# Altium PCB ALIMENTACION BORRADOR.PcbDoc
Units mil, origin at the board's own origin, x right, y up, seen from the top; angles counter-clockwise.
Board outline 6000 x 4000 mil, 2 copper layers (Top Layer, Bottom Layer); 31 components, 18 nets, 67 pads, 0 vias.
Unrouted connection lines stored in the file: 36.
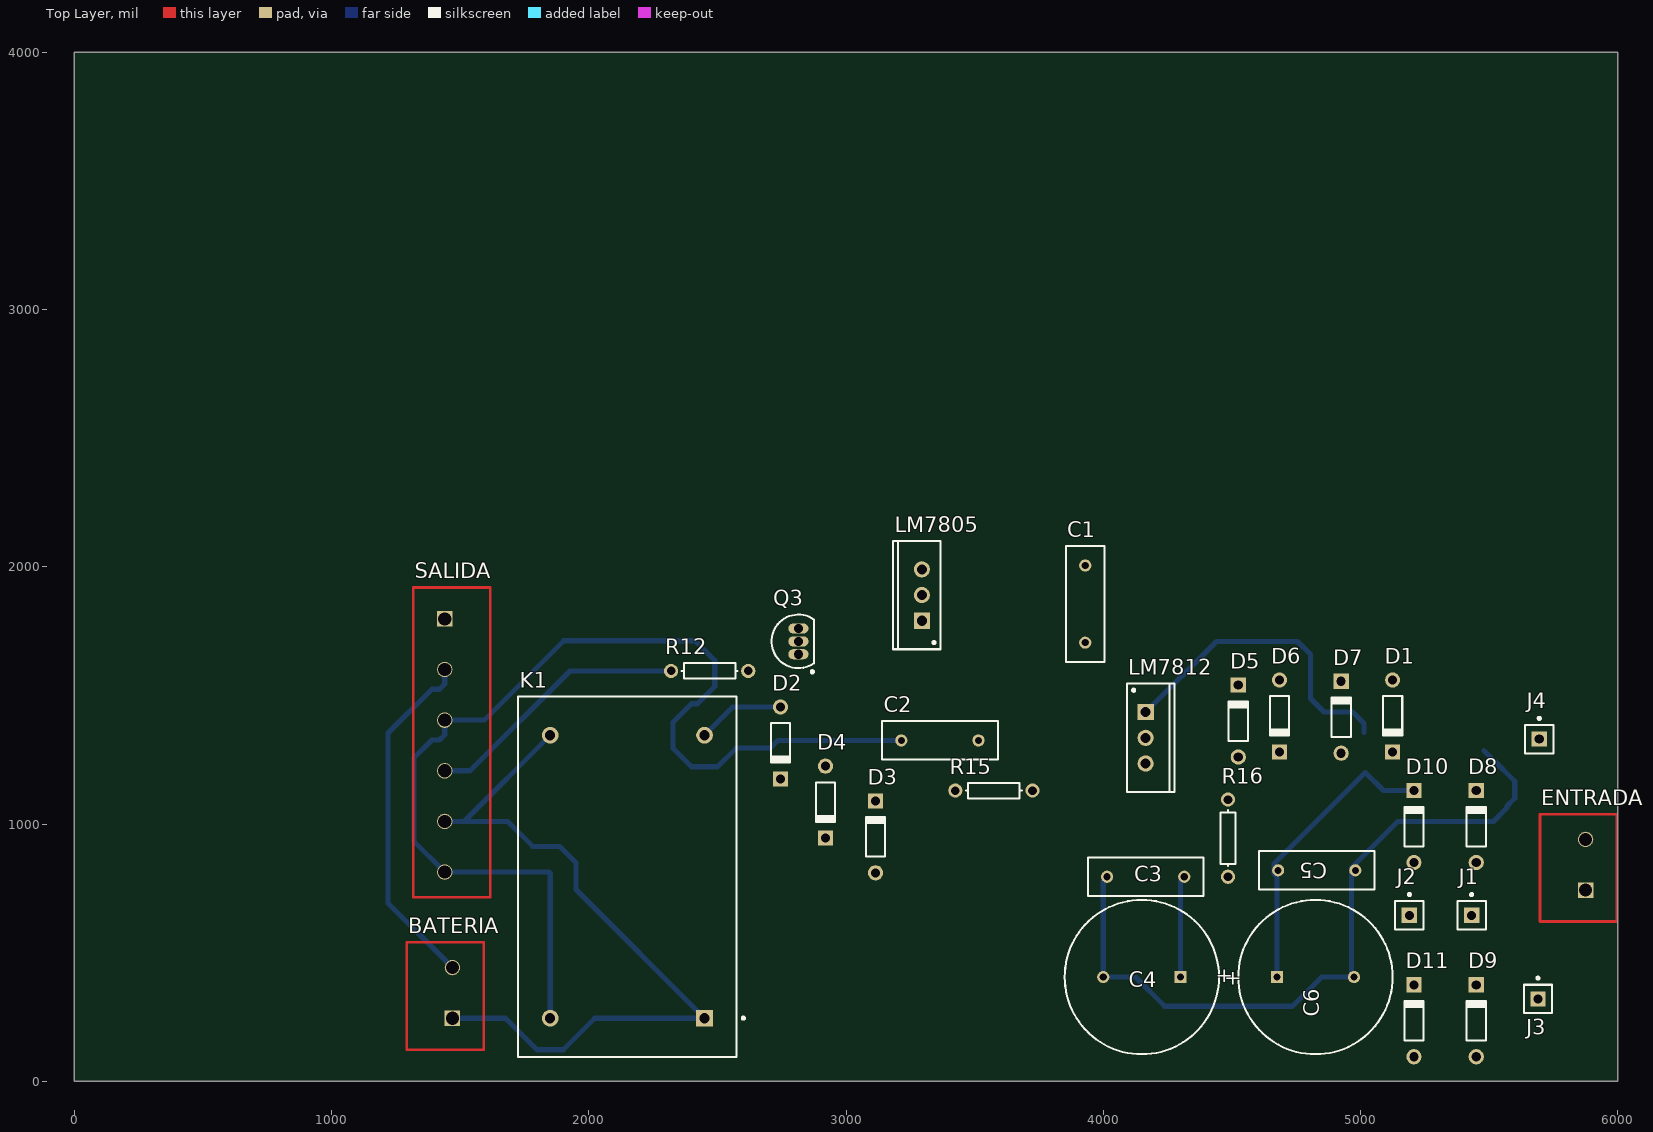
[diagram p0: Top Layer view]
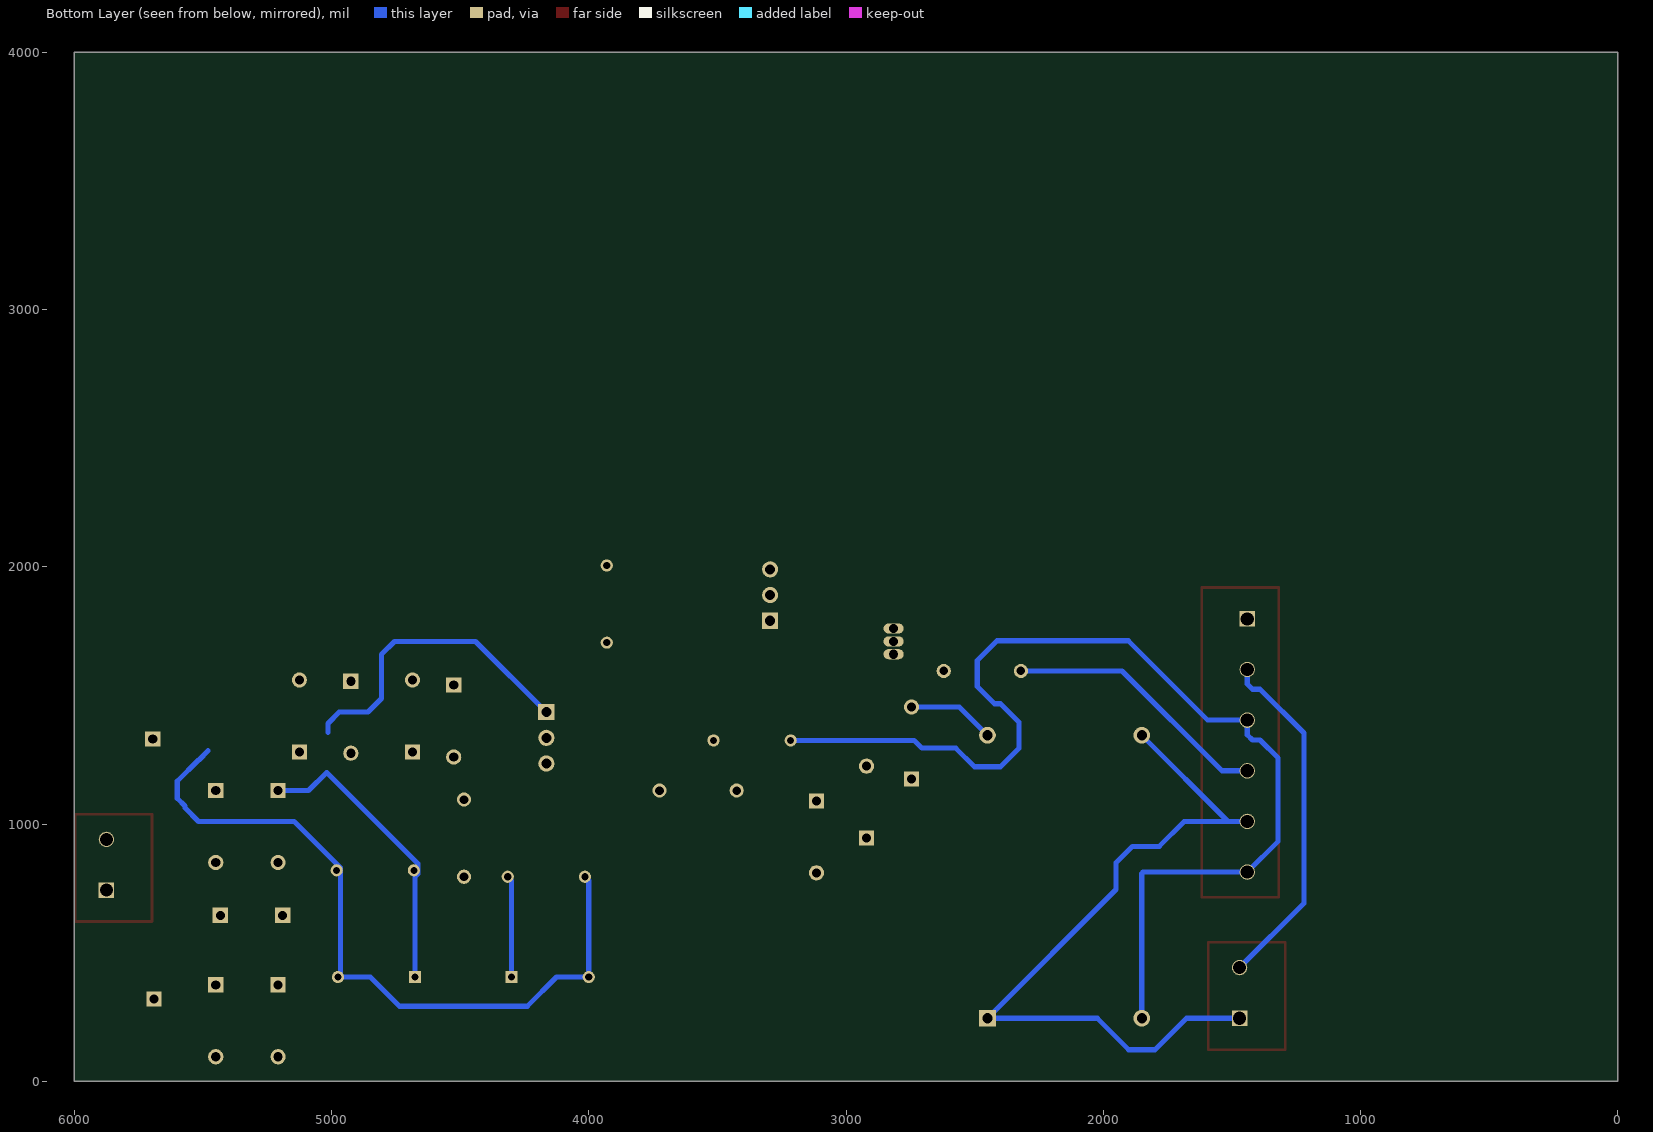
[diagram p1: Bottom Layer view, seen from below]

## Layer stack, top to bottom
Top Solder: solder mask 0.4, Solder Resist, Dk 3.5
Top Layer: signal copper 1.4
Dielectric 1: dielectric 12.6, FR-4, Dk 4.8
Bottom Layer: signal copper 1.4
Bottom Solder: solder mask 0.4, Solder Resist, Dk 3.5

## Board outline
0,0 6000,0 6000,4000 0,4000

## Design rules (kind name [scope] priority, off if disabled: settings)
Clearance [All] p1: gap=80 ignorepadtopadclearanceinfootprint=FALSE
PolygonConnect [All] p1: connectstyle=Relief reliefconductorwidth=10 reliefentries=4 polygonreliefangle="90 Angle" airgapwidth=10
RoutingVias [All] p1: holewidth=28 width=50 viastyle="Through Hole" minholewidth=28 minwidth=50 maxholewidth=28 maxwidth=50
SolderMaskExpansion [All] p1: expansion=4
Width [All] p1: maxlimit=80 minlimit=20 preferedwidth=40
30 further rules are at their usual default settings.

## Components (designator, comment, footprint, x,y, rotation, side; value= is the part's Value field where it differs from the comment)
BATERIA "Header 2" "Bornera 2 pin" 1292.83,122.95 r90 top
C1 "Cap" RAD-0.3 3930,1855 r90 top value=100pF
C2 "Cap" RAD-0.3 3365,1325 r180 top value=100pF
C3 "Cap" RAD-0.3 4165,795 r0 top value=100pF
C4 "Cap Pol1" RB7.6-15 4150,405 r0 top value=100pF
C5 "Cap" RAD-0.3 4830,820 r180 top value=100pF
C6 "Cap Pol1" RB7.6-15 4825,405 r180 top value=100pF
D1 "Diode 1N914" DO-35 5125,1420 r270 top
D2 "Diode 1N914" DO-35 2745,1315 r270 top
D3 "D Schottky" DO-35 3115,950 r90 top
D4 "Diode 1N914" DO-35 2920,1085 r270 top
D5 "Diode 1N914" DO-35 4525,1400 r90 top
D6 "Diode 1N914" DO-35 4685,1420 r270 top
D7 "Diode 1N914" DO-35 4925,1415 r90 top
D8 "Diode 1N914" DO-35 5450,990 r90 top
D9 "Diode 1N914" DO-35 5450,235 r90 top
D10 "Diode 1N914" DO-35 5207.72,990 r90 top
D11 "Diode 1N914" DO-35 5207.72,235 r90 top
"ENTRADA 220" "220V" "Bornera 2 pin" 5697.83,621.1 r90 top
J1 "Socket" PIN1 5432.28,645 r0 top
J2 "Socket" PIN1 5190,645 r0 top
J3 "Socket" PIN1 5690,320 r0 top
J4 "Socket" PIN1 5695,1330 r0 top
K1 "Relay-SPST" MODULE4 2150,795 r90 top
LM7805 "Volt Reg" TO-220AB 3295,1890 r90 top
LM7812 "Volt Reg" TO-220AB 4165,1335 r270 top
Q3 "NPN" TO-226-AA 2815,1710 r0 top
R12 "Res1" AXIAL-0.3 2470,1595 r0 top value=1K
R15 "Res1" AXIAL-0.3 3575,1130 r0 top value=1K
R16 "Res1" AXIAL-0.3 4485,945 r270 top value=1K
SALIDA "Header 6" "BORNERA 6 PIN" 1617.17,1919.45 r270 top

## Footprints (in the part's own frame and the unit in brackets; to place one, negate y for a bottom-side part, rotate by r counter-clockwise, add the part's x,y. Pads: shape width x height; smd on the part's side, far side on the other; paste and mask are expansions set on the pad)
AXIAL-0.3 [mm] "Axial Device, Thru-Hole; 2 Leads; 0.3 in Pin Spacing"
  round 1.4 hole 0.85: 1(-3.81,0) 2(3.81,0)
  silkscreen extent -2.77,-0.76 2.77,0.76
"Bornera 2 pin" [mm]
  rect 1.524x1.524 hole 1.3: 1(3.1,-4.5)
  round 1.524 hole 1.3: 2(8.1,-4.5)
  Top Layer lines w0.254: 0,0 10.6,0 10.6,-7.6 0,-7.6 0,0
"BORNERA 6 PIN" [mm]
  rect 1.524x1.524 hole 1.3: 1(3.1,-4.5)
  round 1.524 hole 1.3: 2(8.1,-4.5) 3(13.1,-4.5) 4(18.1,-4.5) 5(23.1,-4.5) 6(28.1,-4.5)
  Top Layer lines w0.254: 30.6,-7.6 30.6,0 0,0 0,-7.6 30.6,-7.6
DO-35 [mm] "Diode, Axial; Body 3.8 x 1.9 mm (LxDia. max), Lead Dia. 0.53 mm (max)"
  round 1.5 hole 0.9: 1(-3.55,0)
  rect 1.5x1.5 hole 0.9: 2(3.55,0)
  silkscreen extent -1.95,-0.95 2.05,0.95
MODULE4 [mm] "DIP; 4 Round Pins; Row Space 27.94 mm; Pitch 15.24 mm"
  rect 1.65x1.65 hole 1: 1(-13.97,-7.62)
  round 1.65 hole 1: 2(-13.97,7.62) 3(13.97,-7.62) 4(13.97,7.62)
  silkscreen extent -17.8,-11.58 17.8,10.8, body extent -17.8,-10.8 17.8,10.8, height 14
PIN1 [mm] "Connector; Plug"
  rect 1.5x1.5 hole 0.9: 1(0,0)
  silkscreen extent -1.4,-1.4 1.4,2.17
RAD-0.3 [mm] "Radial Cap, Thru-Hole; 2 Leads; 0.3 in Pin Spacing"
  round 1.2 hole 0.7: 1(-3.81,0) 2(3.81,0)
  silkscreen extent -5.71,-1.91 5.71,1.91
RB7.6-15 [mm] "Polarized Capacitor (Radial); 2 Leads"
  rect 1.2x1.2 hole 0.7: 1(3.81,0)
  round 1.2 hole 0.7: 2(-3.81,0)
  silkscreen extent -7.62,-7.62 7.62,7.62
TO-220AB [mm] "TO, Thru-Hole, Vertical, Heatsink Mounted; 3 In-Line Leads; Pitch 2.54 mm"
  rect 1.6x1.6 hole 1: 1(-2.54,0)
  round 1.6 hole 1: 2(0,0) 3(2.54,0)
  silkscreen extent -5.35,-1.85 5.35,2.85, body extent -5.4,-1.9 5.4,2.9, height 19.3
TO-226-AA [mm] "TO, Flat Index; 3 In-Line, Axial Leads; Body Dia. 4.8mm; Leads 0.55 x 0.51 mm (max)"
  oval 2x1 hole 0.9: 1(0,-1.27) 2(0,0) 3(0,1.27)
  silkscreen extent -2.65,-3.13 1.52,2.65, body extent -2.65,-2.66 1.52,2.66, height 5.33

## Part data
BATERIA: "Header, 2-Pin", LatestRevisionDate=17-Jul-2002, LatestRevisionNote="Re-released for DXP Platform.", Publisher="Altium Limited"
C1 C2 C3 C5: "Capacitor", LatestRevisionDate=17-Jul-2002, LatestRevisionNote="Re-released for DXP Platform.", PackageDescription="Radial Cap, Thru-Hole; 2 Leads; 0.3 in Pin Spacing", PackageReference=RAD-0.3, Published=8-Jun-2000, Publisher="Altium Limited"
C4 C6: "Polarized Capacitor (Radial)", LatestRevisionDate=17-Jul-2002, LatestRevisionNote="Re-released for DXP Platform.", PackageDescription="Polarized Capacitor (Radial); 2 Leads", PackageReference=RB7.6-15, Published=8-Jun-2000, Publisher="Altium Limited"
D1 D2 D4 D5 D6 D7 D8 D9 D10 D11: "High Conductance Fast Diode", Code_JEDEC=DO-204-AH, ComponentLink1Description="Manufacturer Link", ComponentLink1URL=http://www.fairchildsemi.com/, ComponentLink2Description=Datasheet, ComponentLink2URL=http://www.fairchildsemi.com/ds/1N%2F1N4448.pdf, DatasheetVersion=1997, LatestRevisionDate=17-Jul-2002, LatestRevisionNote="Re-released for DXP Platform.", PackageDescription="Diode, Axial; Body 3.8 x 1.9 mm (LxDia. max), Lead Dia. 0.53 mm (max)", PackageReference=DO-35, Published=8-Jun-2000, Publisher="Altium Limited"
D3: "Schottky Diode", Code_JEDEC=DO-214-AA, LatestRevisionDate=17-Jul-2002, LatestRevisionNote="Re-released for DXP Platform.", PackageDescription="DO-214-AA/SMB; 2 C-Bend Leads; Body 5.3 x 3.6 mm, inc. leads (LxW)", PackageReference=SMB, Published=8-Jun-2000, Publisher="Altium Limited"
"ENTRADA 220": library part "Header 2", "Header, 2-Pin", LatestRevisionDate=17-Jul-2002, LatestRevisionNote="Re-released for DXP Platform.", Publisher="Altium Limited"
K1: "Single-Pole Single-Throw Relay", LatestRevisionDate=17-Jul-2002, LatestRevisionNote="Re-released for DXP Platform.", PackageReference=MODULE4, Published=24-Mar-1999, Publisher="Altium Limited"
LM7805 LM7812: "Voltage Regulator", LatestRevisionDate=29-May-2009, LatestRevisionNote="IPC-7351 Footprint Added.", PackageDescription="3-Pin Transistor Outline Package 2.54 mm Pitch, 15.1 mm Lead Span", PackageReference=D2PAK, Published=24-Mar-1999, Publisher="Altium Limited"
Q3: "NPN Bipolar Transistor", Code_JEDEC=TO-226-AA, LatestRevisionDate=17-Jul-2002, LatestRevisionNote="Re-released for DXP Platform.", PackageDescription="TO, Flat Index; 3 In-Line, Axial Leads; Body Dia. 4.8mm; Leads 0.55 x 0.51 mm (max)", PackageReference=TO-226-AA, Published=8-Jun-2000, Publisher="Altium Limited"
R12 R15 R16: "Resistor", LatestRevisionDate=17-Jul-2002, LatestRevisionNote="Re-released for DXP Platform.", PackageDescription="Axial Device, Thru-Hole; 2 Leads; 0.3 in Pin Spacing", PackageReference=AXIAL-0.3, Published=8-Jun-2000, Publisher="Altium Limited"
SALIDA: "Header, 6-Pin", LatestRevisionDate=17-Jul-2002, LatestRevisionNote="Re-released for DXP Platform.", Publisher="Altium Limited"
J1 J2 J3 J4: LatestRevisionDate=17-Jul-2002, LatestRevisionNote="Re-released for DXP Platform.", Publisher="Altium Limited"

## Nets (pads, with @x,y where several pads share a name; then routed paths per layer and width w, separated by ;. In a path a pad name is that pad's centre, name@x,y a point inside that pad or via, vN(x,y) a via of type N, cw(c..) or ccw(c..) an arc to the next point about the centre after c; other vN are vias at no path point)
"13,8 V": BATERIA.1 D2.2 D4.2 K1.1 K1.4 SALIDA.5 | length 2943.4
  Bottom Layer w20: SALIDA.5 1515,1010 ; BATERIA.1 1676.79,245 1799.27,122.52 1900.73,122.52 2023.21,245 K1.1 1950,745 1950,849.57 1886.42,913.15 1781.85,913.15 1685,1010 1515,1010 ; K1.4 1515,1010
"14,5 V": C2.2 D3.2 D4.1 K1.2 LM7805.1 SALIDA.3 SALIDA.6 | length 4273.8
  Bottom Layer w20: K1.2 1850,808.15 1845,813.15 SALIDA.6 1320,933.15 1320,1256.56 1390.29,1326.85 1419.72,1326.85 1440,1347.13 SALIDA.3 1594.07,1403.7 1902.92,1712.56 2412.56,1712.56 2490,1635.12 2490,1535 2422.48,1467.48 2399.27,1467.48 2327.52,1395.73 2327.52,1294.27 2399.27,1222.52 2500.73,1222.52 2572.98,1294.76 2704.76,1294.76 2735,1325 C2.2
"14,8 V": C3.2 C4.1 LM7812.3 R15.2 | length 396.2
  Bottom Layer w20: C4.1 4300,780 C3.2
GND: BATERIA.2 C1.1 C2.1 C3.1 C4.2 C5.1 C6.2 D1.2 D9.1 D11.1 LM7805.2 Q3.3 SALIDA.2 | length 4251.1
  Bottom Layer w20: SALIDA.2 1440,1543.98 1419.72,1523.7 1390.29,1523.7 1220,1353.41 1220,691.85 BATERIA.2 ; C3.1 4000,780 C4.2 4125.48,405 4239.1,291.38 4735.9,291.38 4849.52,405 C6.2 4965,415 4965,830 5145.24,1010.24 5516.81,1010.24 5569.53,1062.96 5569.53,1069.53 5600,1100 5600,1166.1 5516.81,1249.29 5515.71,1249.29 5480,1285
NetC1_2: C1.2 LM7805.3 SALIDA.1
NetC5_2: C5.2 C6.1 D8.2 D10.2 LM7812.1 R16.2 | length 2394.8
  Bottom Layer w20: LM7812.1 4440,1710 4755,1710 4805.47,1659.53 4805.47,1487.96 4858.19,1435.24 4969.76,1435.24 5013.85,1391.15 5013.85,1355.42 ; C6.1 4675,795 4665,805 4665,846.2 5018.85,1200.05 5089.14,1129.76 D10.2
NetD1_1: D1.1 D7.2
NetD2_1: D2.1 K1.3 Q3.1 | length 340.5
  Bottom Layer w20: K1.3 2559.76,1454.76 D2.1
NetD3_1: D3.1 R15.1
NetD5_1: D5.1 LM7812.2 R16.1
NetD5_2: D5.2 D6.1
NetD6_2: D6.2 D7.1
NetD8_1: D8.1 D9.2 J1.1
NetD10_1: D10.1 D11.2 J2.1
"NetENTRADA 220_1": "ENTRADA 220.1" J3.1
"NetENTRADA 220_2": "ENTRADA 220.2" J4.1
NetQ3_2: Q3.2 R12.2
NetR12_1: R12.1 SALIDA.4 | length 1040.8
  Bottom Layer w20: SALIDA.4 1538.64,1206.85 1926.79,1595 R12.1

## Text inside footprints (layer, text, board x,y; h text height)
C4: Top Overlay "+" at 4470.15,375.99 h59.06
C6: Top Overlay "+" at 4504.85,434.01 h59.06 r180